# EAGLE board test1side (EAGLE 7.1.0)
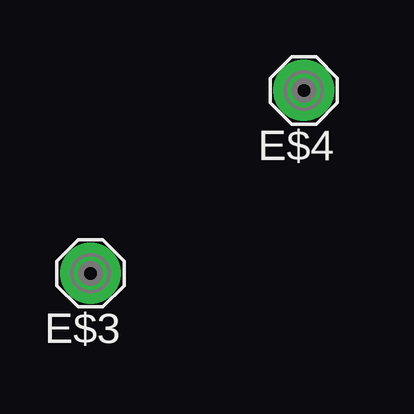
[diagram p0: board, top side]
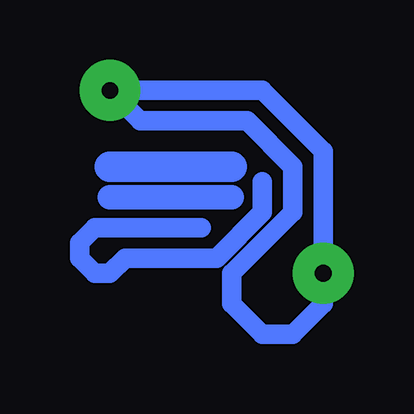
[diagram p1: board, bottom side, seen from below]

No outline drawn. Coordinates in mm, seen from the top.
Copper layers (1*16): Top 0.035mm / dielectric 1.5mm / Bottom 0.035mm
Design rules "default": minimum track width 10mil, minimum drill 24mil, track to track 8mil, track to pad 8mil, pad to pad 8mil, via to via 8mil, smd to smd 8mil, copper to edge 40mil, drill to drill 8mil, minimum pad ring 10mil, minimum via ring 8mil, stop-mask expansion 4mil, vias tented up to drill 0mil, thermal gap 10mil

## Footprints (pad centres in the part's own frame; a part is rotated, then mirrored left to right if it is on the bottom)
SE11 = drill 0.7 pad 2.54: MP 0,0

## Placement (x,y rotation side)
E$3  [SE11]  2.54,3.81 180 top
E$4  [SE11]  11.43,11.43 180 top

## Library data of the parts
E$3 E$4 = solpad

## Nets
S$1: E$3.MP E$4.MP

## Tracks (layer width: path | path; a pad name or v marks a point on that pad's centre or on a via)
S$1
  Bottom 0.813: E$3.MP 2.54,8.89 5.08,11.43 E$4.MP 10.16,10.16 5.71,10.16 3.81,8.26 3.81,6.35 6.35,3.81 6.35,2.54 5.08,1.27 3.81,1.27 2.54,2.54 E$3.MP
S$2
  Bottom 1.27: 6.35,8.26 11.43,8.26
S$3
  Bottom 1.016: 6.35,6.99 11.43,6.99
S$4
  Bottom 0.813: 7.62,5.71 12.06,5.71 12.7,5.08 12.7,4.45 12.06,3.81 11.43,3.81 10.79,4.45 6.99,4.45 5.08,6.35 5.08,7.62